# EAGLE board Clock Extension (EAGLE 7.6.0)

Size 48 x 38 mm. Coordinates in mm from the lower left corner, seen from the top.
Outline: 0,0 48,0 48,38 0,38 0,0
Copper layers (1*16): Top 0.035mm / dielectric 1.5mm / Bottom 0.035mm
Design rules "default": minimum track width 10mil, minimum drill 24mil, track to track 8mil, track to pad 8mil, pad to pad 8mil, via to via 8mil, smd to smd 8mil, copper to edge 40mil, drill to drill 8mil, minimum pad ring 10mil, minimum via ring 8mil, stop-mask expansion 4mil, vias tented up to drill 0mil, thermal gap 10mil

## Footprints (pad centres in the part's own frame; a part is rotated, then mirrored left to right if it is on the bottom)
C025-030X050 = drill 0.813 pad 1.422 octagon: 1 -1.27,0; 2 1.27,0
1X04 = drill 1.016 long: 1 -3.81,0; 2 -1.27,0; 3 1.27,0; 4 3.81,0
1206 = smd 1.6 x 1.803: A -1.422,0; C 1.422,0
TO92 = drill 0.813 octagon: 1 1.27,0; 2 0,1.905; 3 -1.27,0
TRIM_POT_PTH = drill 1 pad 1.88: 1 -2.54,-2.54; 2 0,2.54; 3 2.54,-2.54
R1206 = smd 1.6 x 1.803: 1 -1.422,0; 2 1.422,0
DIL08 = drill 0.813 pad 1.27: 1 -3.81,-3.81; 2 -1.27,-3.81; 3 1.27,-3.81; 4 3.81,-3.81; 5 3.81,3.81; 6 1.27,3.81; 7 -1.27,3.81; 8 -3.81,3.81
MOLEX_480371000 = smd 1.2 x 2: 1 3.5,2.6; 2 1,2.6; 3 -1,2.6; 4 -3.5,2.6 | drill 2.5: M1 -5.7,0; M2 5.7,0 | hole 1.1: -2.25,0; 2.25,0

## Placement (x,y rotation side)
C1_33UF  [C025-030X050]  5.5,31.5 0 top
C2_100MF  [C025-030X050]  5.5,7 0 top
JP1  [1X04]  24.5,35.8 0 top
LED_OUTPUT  [1206]  21.2,27 90 top
LED_OUTPUT_REVERSE  [1206]  27.8,27 90 top
Q1  2N3906  [TO92]  42.5,6.5 180 top
R2_POT_10K  [TRIM_POT_PTH]  39,25 270 top
R_1.2K_1  [R1206]  28,14.5 0 top
R_1K_2  [R1206]  38,14.5 180 top
R_1K_3  [R1206]  19,14.5 0 top
T555_CLOCK  NE555N  [DIL08]  8.5,19.5 270 top
X1  USB-A  [MOLEX_480371000]  25,2.7 0 top

## Library data of the parts
C1_33UF C2_100MF LED_OUTPUT LED_OUTPUT_REVERSE R_1.2K_1 R_1K_2 R_1K_3 X1 = adafruit
JP1 = pinhead
Q1 = transistor-pnp
R2_POT_10K = SparkFun-Electromechanical
T555_CLOCK = linear

## Nets
GND: C1_33UF.1 C2_100MF.1 JP1.1 R_1K_3.1 T555_CLOCK.1 X1.4
N$1: R2_POT_10K.3 R_1.2K_1.1 T555_CLOCK.7
N$5: LED_OUTPUT.C R_1K_3.2
N$6: LED_OUTPUT_REVERSE.C R_1K_2.2
THRESHOLD: C1_33UF.2 R2_POT_10K.2 T555_CLOCK.2 T555_CLOCK.6
TMR555_OUTPUT: JP1.3 LED_OUTPUT.A Q1.2 T555_CLOCK.3
TMR555_OUTPUT_REVERSE: JP1.4 Q1.3 R_1K_2.1
VCC: C2_100MF.2 JP1.2 LED_OUTPUT_REVERSE.A R_1.2K_1.2 T555_CLOCK.4 T555_CLOCK.8 X1.1

## Tracks (layer width: path | path; a pad name or v marks a point on that pad's centre or on a via)
GND  (5 unrouted)
N$1  (2 unrouted)
N$5  (1 unrouted)
N$6  (1 unrouted)
THRESHOLD  (3 unrouted)
TMR555_OUTPUT  (3 unrouted)
TMR555_OUTPUT_REVERSE  (2 unrouted)
VCC  (6 unrouted)

## Text on the board
tNames: GND | VCC | OUT | OUT_R | + | + | + | CLOCK MODULE | SN3906 | + | GND
bNames: PCBv2 - 2017.08 | MadeInTheUSB.net